# Altium PCB PCB1.PcbDoc (part 2 of 3)
Units mil, origin at the board's own origin, x right, y up, seen from the top; angles counter-clockwise.
Board outline 2560 x 1880 mil, 4 copper layers (Top Layer, GND, VCC, Bottom Layer), stack 23.756 mil thick; 154 components, 113 nets, 515 pads, 218 vias.
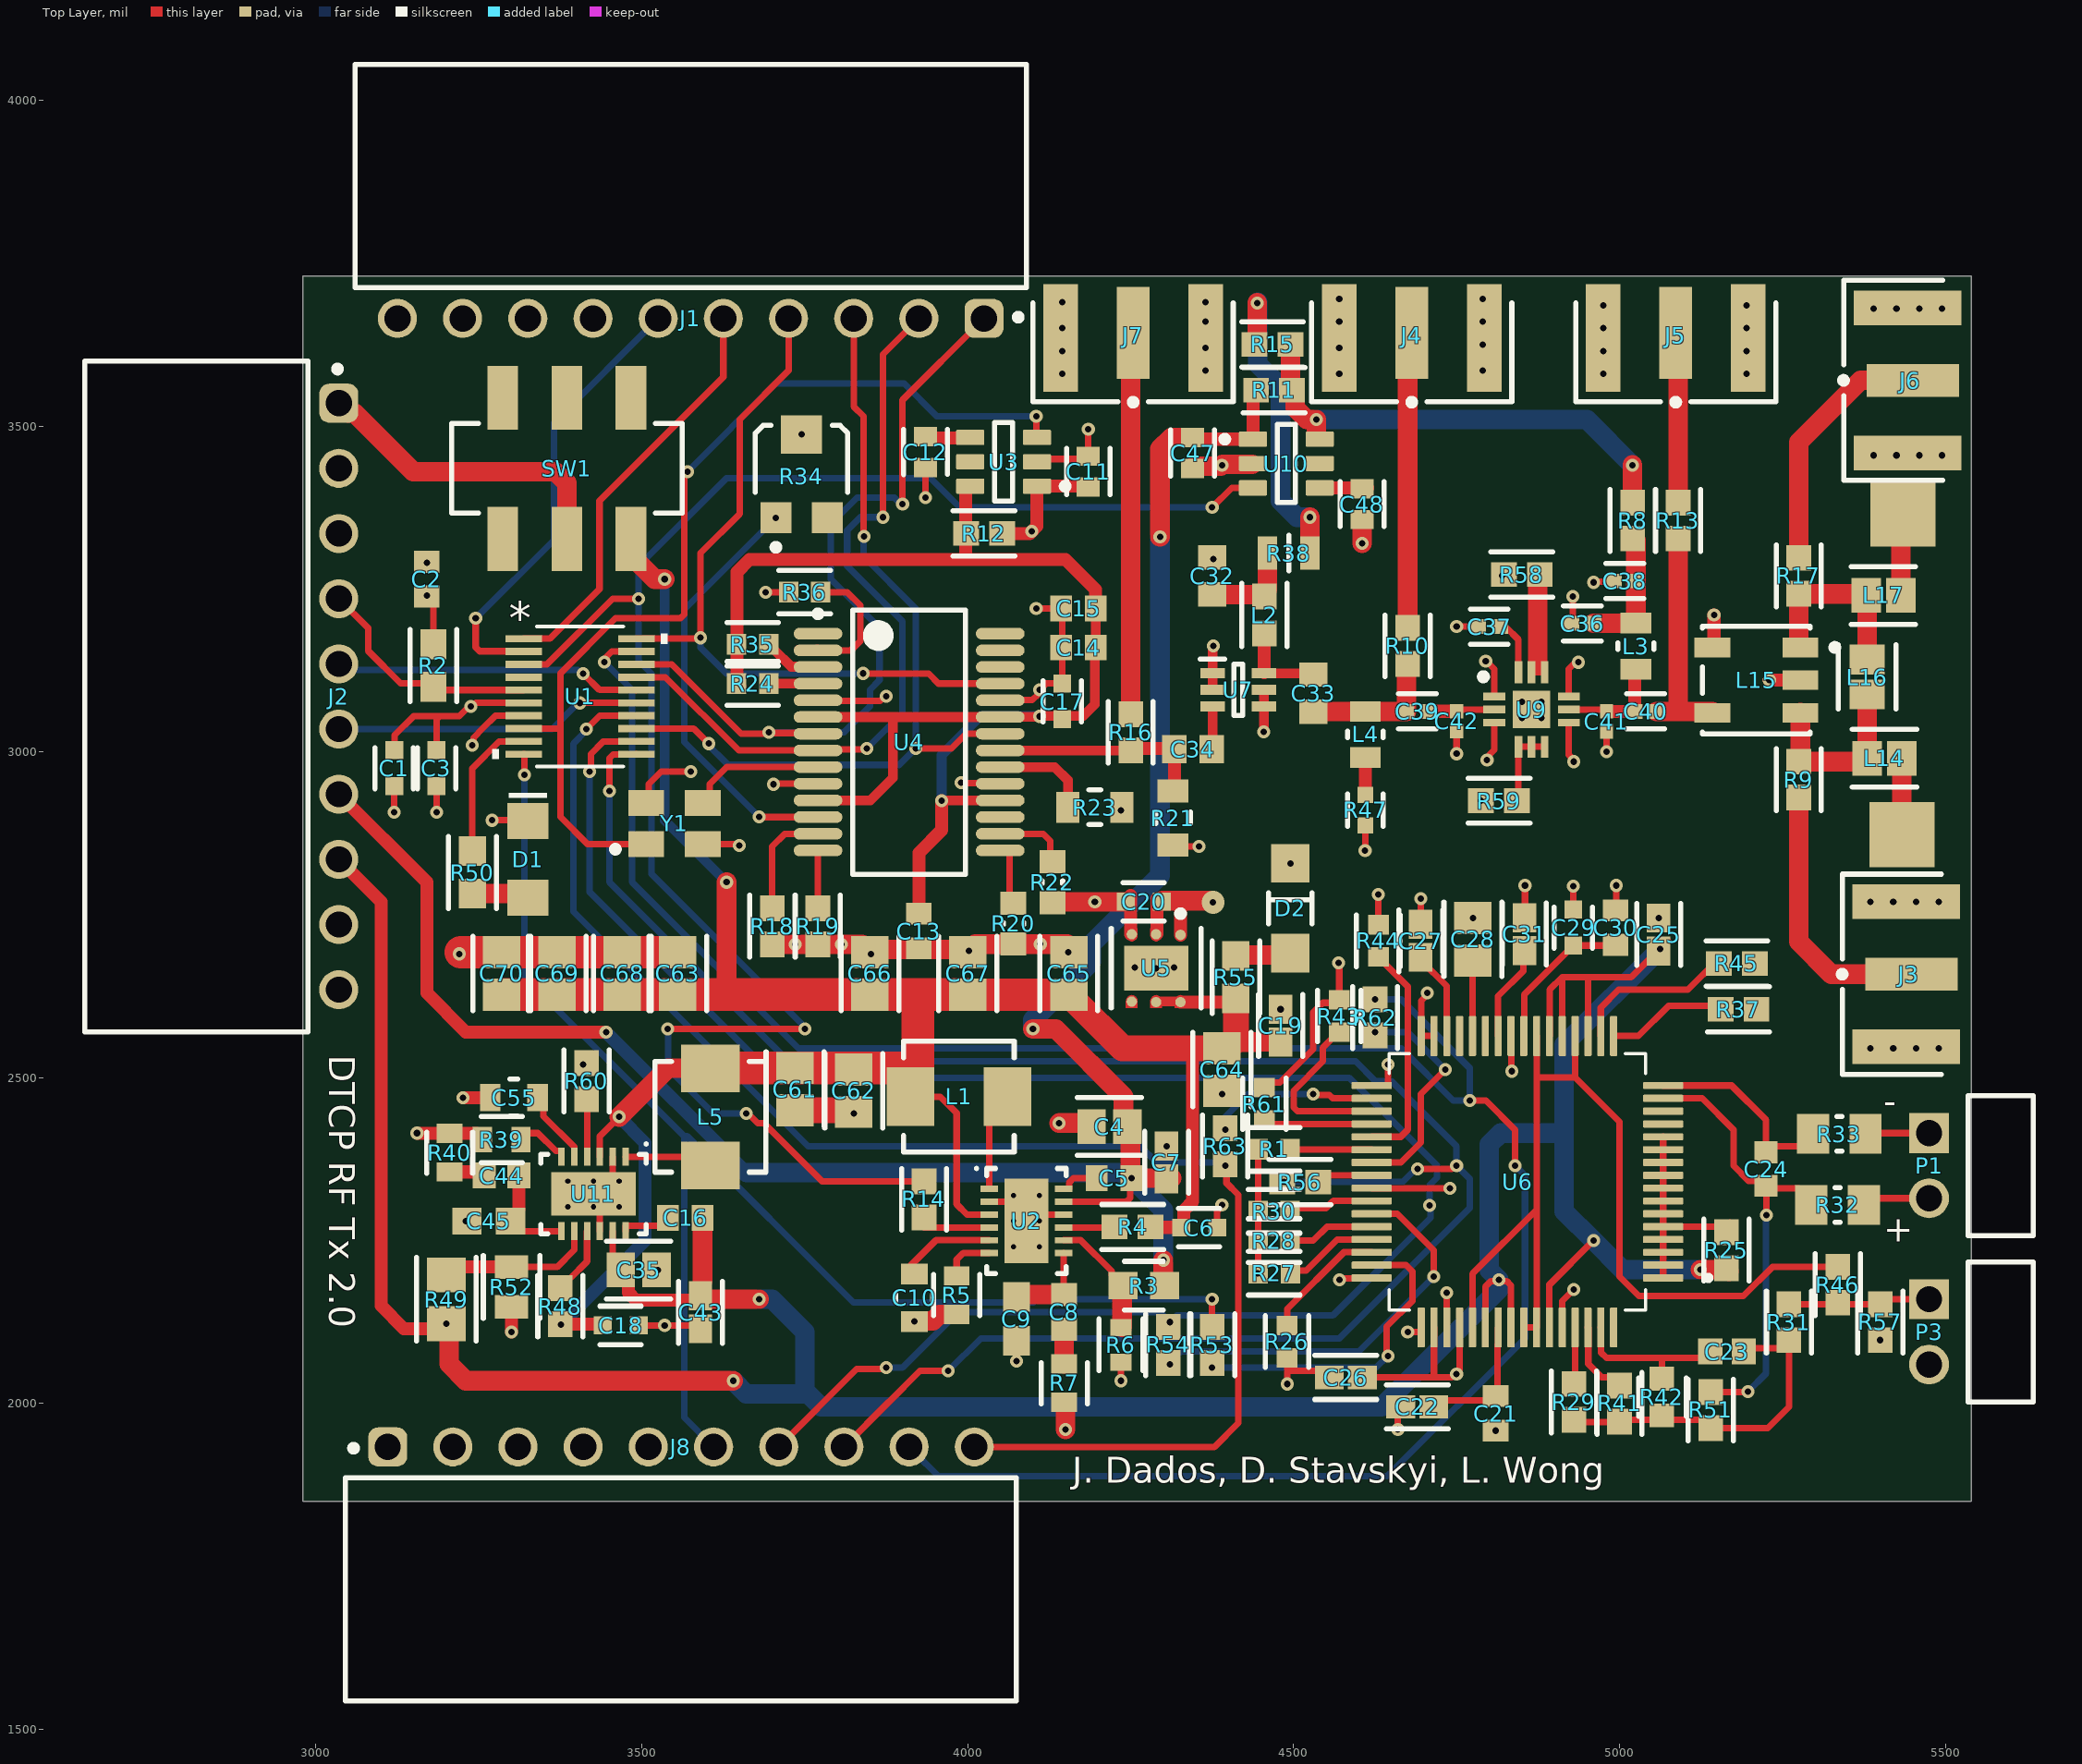
[diagram p0: Top Layer view]

## Part data (continued)
U1: "24MHz ArmÂ® CortexÂ®-M0+ MCU with 16KB flash, 1KB SRAM, 12-bit ADC 20-VSSOP -40 to 125", Manufacturer_Name="Texas Instruments", Copyright="Copyright (C) 2025 Ultra Librarian. All rights reserved.", Datasheet=https://www.ti.com/lit/gpn/mspm0c1104, Manufacturer_Part_Number=MSPM0C1104SDGS20R, RefDes=RefDes, Type=Type
U2 U11: library part CMP-0492-00369-1, "2.5 A Synchronous Step-Up DC/DC Converter with Output Disconnect, 12-pin SON (DE-UE-12), -40 to 125 degC, Pb-Free", Manufacturer="Linear Technology", Code_JEDEC=MO-229, ComponentLink1Description="Manufacturer URL", ComponentLink1URL=http://www.linear.com/, ComponentLink2Description=Datasheet, ComponentLink2URL=http://cds.linear.com/docs/en/datasheet/3122fa.pdf, ComponentLink3Description="Package Specification", ComponentLink3URL=http://cds.linear.com/docs/en/packaging/DFN_12_05-08-1695.pdf, DatasheetVersion="Rev. A", Mounting Technology="Surface Mount", Number of Outputs=1, PackageDescription="12-Pin Plastic DFN, Body 4 x 3 mm, Pitch 0.5 mm", PackageReference=DE-UE-12, PackageVersion="Rev. D, 06/2010", PartNumber=LTC3122EDE#PBF, RoHS=TRUE
U3 U10: library part CMP-04910-000007-2, "IC PWR SWITCH N-CHAN 1:1 SOT23-6", Case/Package=SOT-23-6, Max Operating Temperature=105°C, Max Output Current=2A, Max Supply Voltage=18V, Min Operating Temperature=-40°C, Min Supply Voltage=2.7V, Package Quantity=3000, Fault Protection="Over Temperature", Interface=On/Off, Number of Channels=1, Number of Outputs=1, Output Configuration="High Side", Packaging="Cut Tape", RoHS Compliant=Yes, Series=TPS22810-Q1, Weight=0.000801oz
U4: library part CMP-0293-00041-1, "CMOS, 125 MHz Complete DDS Synthesizer, 10-Bit, Parallel, Serial, RS-28, 1500 Reel, Pb-Free", Code_JEDEC=MO-150-AH, Compliance Range (V)=1.5V, ComponentLink1Description="Manufacturer URL", ComponentLink1URL=www.analog.com, ComponentLink2Description=Datasheet, ComponentLink2URL=http://www.analog.com/static/imported-files/data_sheets/AD9850.pdf, ComponentLink3Description="Package Specification", ComponentLink3URL=http://www.analog.com/static/imported-files/packages/32122249223724RS_28.pdf, DatasheetVersion="Rev. H", FS Iout (mA nom)=20mA, I Supply total (max)=96mA, I/O Interface="Parallel, Serial", Master fclk=125MHz, PackageDescription="28-Lead Shrink Small Outline Package [SSOP]", PackageReference=RS-28, PackageVersion="revA, 1997", REFCLK Multiplier=No, Resolution (Bits)=10bit, Tuning Word Width (bits)=32bit
U5: library part CMP-12153-000011-1, "IC REG LINEAR 3.3V 2A 6DFN", Case/Package=DFN, Dropout Voltage=130mV, Max Input Voltage=6V, Max Operating Temperature=125°C, Min Input Voltage=1.25V, Min Operating Temperature=-40°C, Operating Supply Current=1mA, Output Current=2A, Output Voltage=3.3V, Package Quantity=3000, Lead Free="Lead Free", Mount="Surface Mount", Number of Outputs=1, Number of Regulators=1, Output Type=Fixed, Packaging="Tape and Reel"
U6: "Low-Noise, 4-Channel, 24-Bit Analog-to-Digital Converter for Biopotential Measurements", Manufacturer_Name="Texas Instruments", Mouser Part Number=595-ADS1299-4PAG, Datasheet Link=http://www.ti.com/lit/gpn/ads1299-4, Geometry.Height=1.2mm, Manufacturer_Part_Number=ADS1299-4PAG, Mouser Price/Stock=https://www.mouser.co.uk/ProductDetail/Texas-Instruments/ADS1299-4PAG?qs=9lcNTSmDlCovTG3JfbaYgg%3D%3D
U7: "DC  6 GHz Gain Block", Manufacturer_Name=Qorvo, Mouser Part Number=772-TQP369184, Datasheet Link=https://www.qorvo.com/products/d/da005471, Geometry.Height=1.1mm, Manufacturer_Part_Number=TQP369184, Mouser Price/Stock=https://www.mouser.co.uk/ProductDetail/Qorvo/TQP369184?qs=opBjA1TV900HByuIeJCWsQ%3D%3D
U9: "Integrated Circuit", Manufacturer_Name=Mini-Circuits, Datasheet Link=https://www.minicircuits.com/pdfs/PMA3-43-1W+.pdf, Height=0.89mm, Manufacturer_Part_Number=PMA3-43-1W+
Y1: library part CMP-03913-116855802-1, "830207044109 WE-SPXO Crystal Oscillator", Frequency=100MHz, Max Operating Temperature=85°C, Min Operating Temperature=-40°C, Height=1.2mm, Length=3.2mm, NexarPartId=116855802, Width=2.5mm

## Free pads (board coordinates)
  rect 100x100 smd paste+0 mask+0: 2(5433.22,2873.22) 2(5435,3365)

## Via types
v1: diameter 20, hole 10, Top Layer to Bottom Layer, tented both sides, 205 vias
v2: diameter 19.68, hole 7.87, Top Layer to Bottom Layer, 12 vias
v3: diameter 35, hole 10, Top Layer to Bottom Layer, tented both sides, 1 vias